# EAGLE board NixieTherm v1.03 (EAGLE 9.6.0)
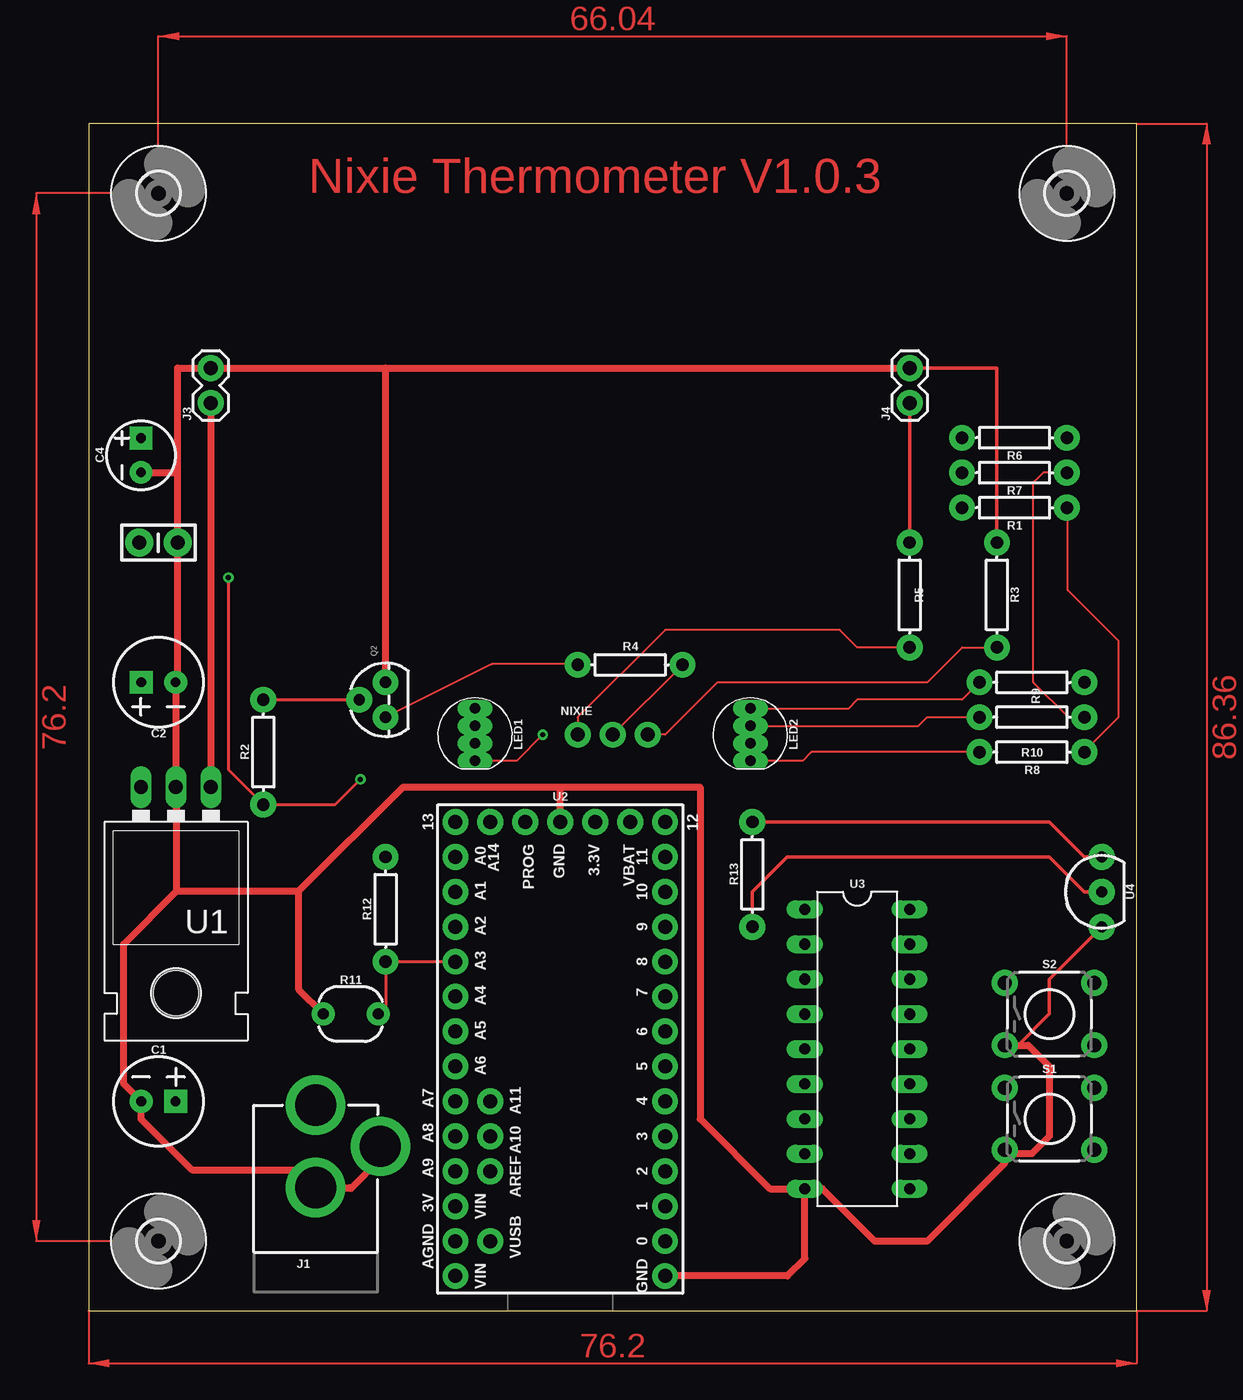
[diagram p0: board, top side]
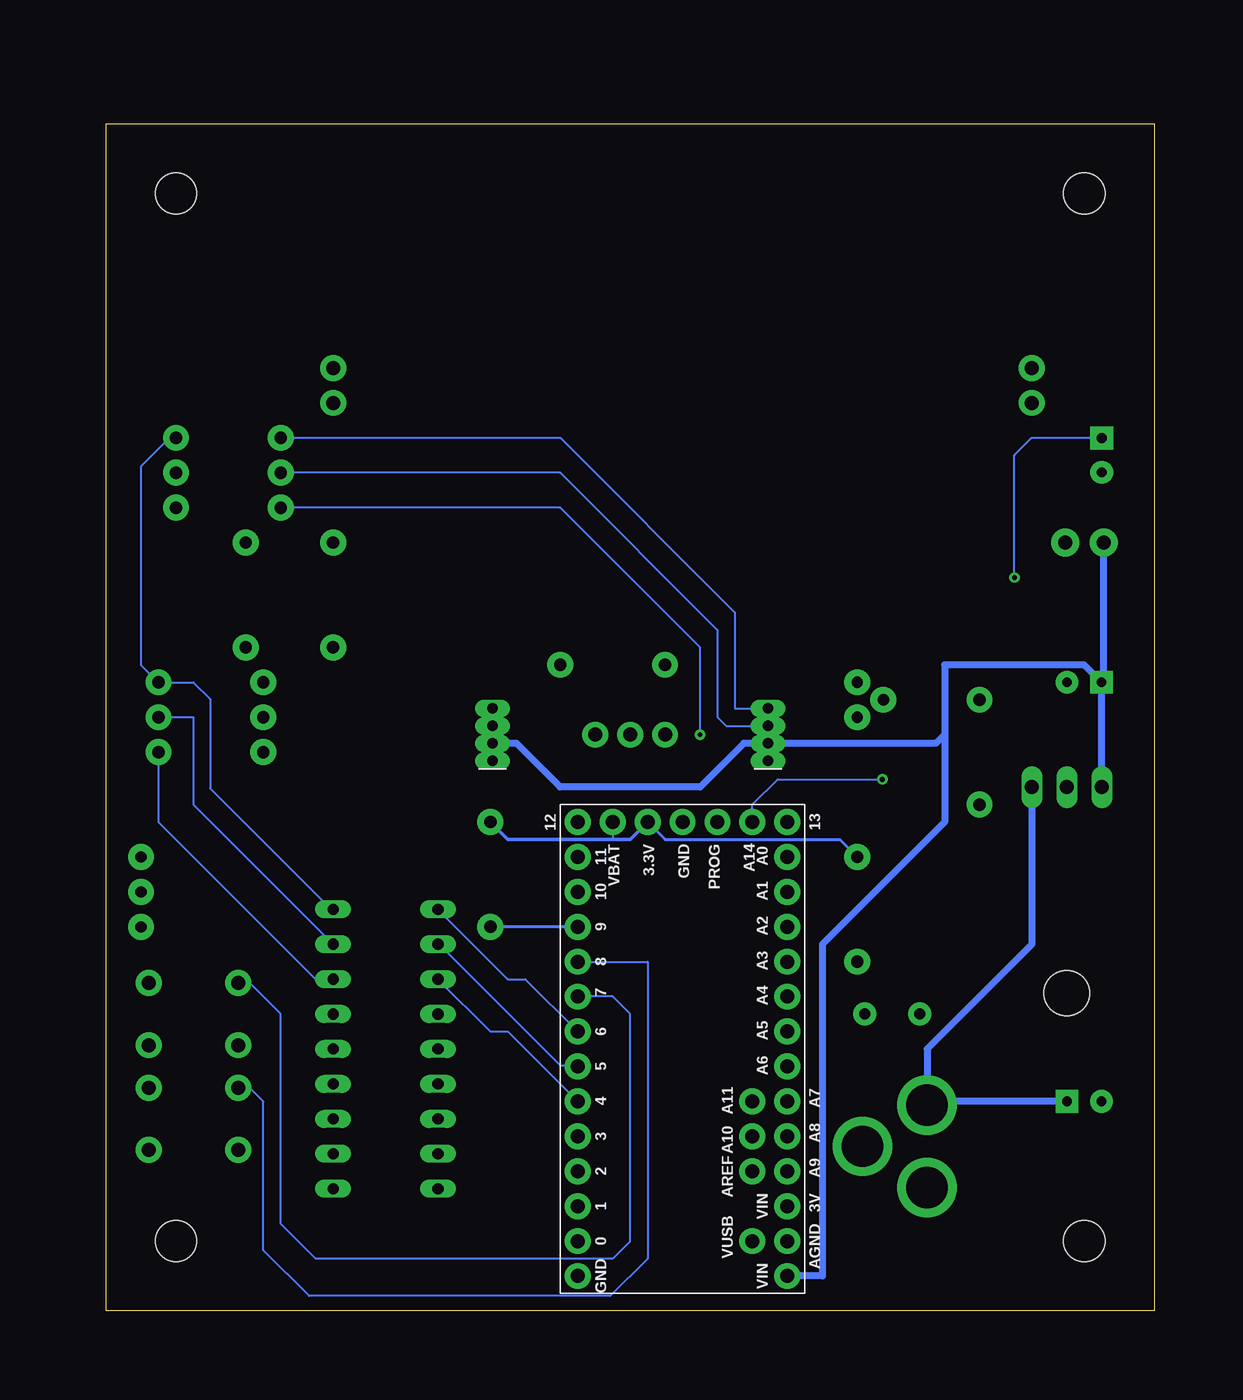
[diagram p1: board, bottom side, seen from below]

Size 76.2 x 86.36 mm. Coordinates in mm from the lower left corner, seen from the top.
Outline: 0,0 76.2,0 76.2,86.36 0,86.36 0,0
Copper layers (1*16): Top 0.035mm / dielectric 1.5mm / Bottom 0.035mm
Design rules "default": minimum track width 6mil, minimum drill 0.35mm, track to track 6mil, track to pad 6mil, pad to pad 6mil, via to via 6mil, smd to smd 6mil, copper to edge 40mil, drill to drill 6mil, minimum pad ring 10mil, minimum via ring 8mil, stop-mask expansion 4mil, vias tented up to drill 0mil, thermal gap 10mil

## Footprints (pad centres in the part's own frame; a part is rotated, then mirrored left to right if it is on the bottom)
CPOL-RADIAL-2.5MM-6.5MM = drill 0.7 pad 1.651 square: 1 1.25,0 | drill 0.7 pad 1.651: 2 -1.25,0
CAP-PTH-SMALL-KIT = drill 1.016 pad 2.032: 1 -1.397,0; 2 1.397,0
CPOL-RADIAL-2.5MM-5MM = drill 0.7 pad 1.651 square: 1 1.25,0 | drill 0.7 pad 1.651: 2 -1.25,0
3,0 = hole 3: 0,0
POWER_JACK_PTH = drill 2.997 pad 4.318: GND 0,7.7; GNDBREAK 4.7,10.7; PWR 0,13.7
1X02 = drill 1.016 pad 1.88: 1 0,0; 2 2.54,0
LED-RGB-THRU = drill 0.762 pad 0.889 long: 1 1.905,0; 2 0.635,0; 3 -0.635,0; 4 -1.905,0
1X03_NO_SILK = drill 1.016 pad 1.88: 1 0,0; 2 2.54,0; 3 5.08,0
TO-92 = drill 0.813 pad 1.88: 1 -1.27,0; 2 0,1.905; 3 1.27,0
AXIAL-0.3 = drill 0.9 pad 1.88: P$1 -3.81,0; P$2 3.81,0
PHOTOCELL = drill 0.8 pad 1.676: 1 -2,0; 2 2,0
TACTILE_SWITCH_PTH_6.0MM = drill 1.016 pad 1.88: 1 -3.251,2.261; 2 3.251,2.261; 3 -3.251,-2.261; 4 3.251,-2.261
TO-220-ALT = drill 1.016 long: GND 0,-3.81; IN -2.54,-3.81; OUT 2.54,-3.81 | hole 3.302: 0,11.176
TEENSY-3.1 = drill 1.016 pad 1.88: 0 7.62,-13.97; 1 7.62,-11.43; 2 7.62,-8.89; 3 7.62,-6.35; 3.3V 2.54,16.51; 3V -7.62,-11.43; 4 7.62,-3.81; 5 7.62,-1.27; 6 7.62,1.27; 7 7.62,3.81; 8 7.62,6.35; 9 7.62,8.89; 10 7.62,11.43; 11 7.62,13.97; 12 7.62,16.51; 13 -7.62,16.51; 14 -7.62,13.97; 15 -7.62,11.43; 16 -7.62,8.89; 17 -7.62,6.35; 18 -7.62,3.81; 19 -7.62,1.27; 20 -7.62,-1.27; 21 -7.62,-3.81; 22 -7.62,-6.35; 23 -7.62,-8.89; A10 -5.08,-6.35; A11 -5.08,-3.81; A14/DAC -5.08,16.51; AGND -7.62,-13.97; AREF -5.08,-8.89; GND 0,16.51; GND1 7.62,-16.51; PROG -2.54,16.51; VBAT 5.08,16.51; VIN -7.62,-16.51; VUSB -5.08,-13.97
DIL18 = drill 0.813 long: 1 -10.16,-3.81; 2 -7.62,-3.81; 3 -5.08,-3.81; 4 -2.54,-3.81; 5 0,-3.81; 6 2.54,-3.81; 7 5.08,-3.81; 8 7.62,-3.81; 9 10.16,-3.81; 10 10.16,3.81; 11 7.62,3.81; 12 5.08,3.81; 13 2.54,3.81; 14 0,3.81; 15 -2.54,3.81; 16 -5.08,3.81; 17 -7.62,3.81; 18 -10.16,3.81
TO-92-AMMO = drill 0.813 pad 1.88: 1 -2.54,0; 2 0,0; 3 2.54,0

## Placement (x,y rotation side)
C1  100uF  [CPOL-RADIAL-2.5MM-6.5MM]  5.08,15.24 0 top
C2  100uF  [CPOL-RADIAL-2.5MM-6.5MM]  5.08,45.72 180 top
C3  0.1uF  [CAP-PTH-SMALL-KIT]  5.08,55.88 0 top
C4  10uF  [CPOL-RADIAL-2.5MM-5MM]  3.81,62.23 90 top
H1  MOUNT-HOLE3.0  [3,0]  71.12,81.28 0 top
H2  MOUNT-HOLE3.0  [3,0]  5.08,5.08 0 top
H3  MOUNT-HOLE3.0  [3,0]  71.12,5.08 0 top
H4  MOUNT-HOLE3.0  [3,0]  5.08,81.28 0 top
J1  +12VDC  [POWER_JACK_PTH]  16.51,1.27 0 top
J3  J3  [1X02]  8.89,66.04 90 top
J4  J4  [1X02]  59.69,66.04 90 top
LED1  CLEAR  [LED-RGB-THRU]  28.09,41.91 270 top
LED2  CLEAR  [LED-RGB-THRU]  48.11,41.91 270 top
NIXIE  IN-12  [1X03_NO_SILK]  35.56,41.91 0 top
Q2  2N4960  [TO-92]  21.59,44.45 90 top
R1  330  [AXIAL-0.3]  67.31,58.42 180 top
R2  4K7  [AXIAL-0.3]  12.7,40.64 90 top
R3  100k  [AXIAL-0.3]  66.04,52.07 270 top
R4  420  [AXIAL-0.3]  39.37,46.99 0 top
R5  220K  [AXIAL-0.3]  59.69,52.07 270 top
R6  330  [AXIAL-0.3]  67.31,63.5 180 top
R7  330  [AXIAL-0.3]  67.31,60.96 180 top
R8  330  [AXIAL-0.3]  68.58,40.64 180 top
R9  330  [AXIAL-0.3]  68.58,45.72 180 top
R10  330  [AXIAL-0.3]  68.58,43.18 180 top
R11  PHOTOCELLPTH  [PHOTOCELL]  19.05,21.59 0 top
R12  10k  [AXIAL-0.3]  21.59,29.21 90 top
R13  1k  [AXIAL-0.3]  48.26,31.75 90 top
S1  SPST  [TACTILE_SWITCH_PTH_6.0MM]  69.85,13.97 0 top
S2  SPST  [TACTILE_SWITCH_PTH_6.0MM]  69.85,21.59 0 top
U1  LM7805  [TO-220-ALT]  6.35,34.29 180 top
U2  TEENSY-3.1SILK  [TEENSY-3.1]  34.29,19.05 0 top
U3  ULN2003  [DIL18]  55.88,19.05 270 top
U4  DS18B20  [TO-92-AMMO]  73.66,30.48 90 top

## Library data of the parts
C1 C2 = SparkFun-Capacitors; PROD_ID: CAP-08439
C3 = SparkFun-Capacitors; PROD_ID: CAP-08370
C4 = SparkFun-Capacitors; PROD_ID: CAP-08440
H1-H4 = holes
J1 = SparkFun-Connectors; PROD_ID: CONN-08197
J3 J4 NIXIE = SparkFun-Connectors
LED1 LED2 = SparkFun-LED; PROD_ID: DIO-10631
Q2 = User-Submitted
R1 R6-R10 R13 = SparkFun-Resistors; PROD_ID: RES-12182
R2-R5 = SparkFun-Resistors; PROD_ID: RES-12184
R11 = SparkFun-Sensors; PROD_ID: COMP-09129; SF_ID: SEN-09088
R12 = SparkFun-Resistors; PROD_ID: RES-12183
S1 S2 = SparkFun-Switches; PROD_ID: SWCH-08441; SF_SKU: COM-00097
U1 = SparkFun-IC-Power; PROD_ID: VREG-08450; SF_ID: COM-00107
U2 = SparkFun-Boards; SF_ID: DEV-12646
U3 = SparkFun-IC-Special-Function
U4 = SparkFun-Sensors; STORE_ID: SEN-00245

## Nets
3.3V: R12.P$2 R13.P$2 U2.3.3V U2.VBAT U4.3
3V: U2.3V
5V: C2.1 C3.1 LED1.2 LED2.2 U1.OUT U2.VIN
12V: C1.1 J1.PWR J3.1 U1.IN
AGND: U2.AGND
GND: C1.2 C2.2 C3.2 C4.2 J1.GND J1.GNDBREAK J3.2 J4.2 Q2.3 R3.P$1 R11.1 S1.3 S2.3 U1.GND U2.GND U2.GND1 U3.9 U4.1
N$1: R6.P$1 R9.P$1 U3.18
N$2: R1.P$1 R8.P$1 U3.16
N$3: R7.P$1 R10.P$1 U3.17
N$4: NIXIE.1 R5.P$2
N$5: NIXIE.3 R3.P$2
N$6: NIXIE.2 R4.P$2
N$7: Q2.2 R2.P$2
N$8: Q2.1 R4.P$1
N$9: C4.1 R2.P$1 U2.A14/DAC
N$10: U2.4 U3.3
N$11: U2.5 U3.2
N$12: U2.6 U3.1
N$13: S2.1 U2.7
N$14: LED1.1 R1.P$2
N$15: S1.1 U2.8
N$16: LED1.4 R6.P$2
N$17: LED1.3 R7.P$2
N$18: LED2.1 R8.P$2
N$19: LED2.4 R9.P$2
N$20: LED2.3 R10.P$2
N$21: J4.1 R5.P$1
N$22: R11.2 R12.P$1 U2.17
N$23: R13.P$1 U2.9 U4.2
VUSB: U2.VUSB

## Tracks (layer width: path | path; a pad name or v marks a point on that pad's centre or on a via)
3.3V
  Top 0.254: U4.3 72.39,33.02 69.85,35.56 R13.P$2
  Bottom 0.152: U2.VBAT 39.37,34.29
  Bottom 0.203: U2.3.3V 35.56,34.29 22.86,34.29 R12.P$2
  Bottom 0.254: R13.P$2 46.99,34.29 39.37,34.29 38.1,34.29 U2.3.3V
5V
  Top 0.152: 3.96,45.82 C2.1 3.81,45.67
  Bottom 0.152: 26.26,2.54 U2.VIN 26.67,3.35 | 3.81,38.05 U1.OUT | 32.92,37.95 33.02,38.1
  Bottom 0.508: U1.OUT 3.81,45.7 C2.1 | C2.1 3.68,45.87 C3.1 | C2.1 5.1,46.99 15.24,46.99 15.24,41.91 | 15.24,41.91 15.88,41.27 LED1.2 29.84,41.27 33.02,38.1 43.18,38.1 46.35,41.27 LED2.2 | 15.24,41.91 15.24,35.56 24.13,26.67 24.13,2.54 U2.VIN
12V
  Top 0.508: J3.1 U1.IN
  Bottom 0.152: 16.41,14.94 J1.PWR 16.41,15.09
  Bottom 0.508: U1.IN 8.89,26.67 16.51,19.05 16.51,15.24 | 16.51,15.24 J1.PWR | C1.1 16.51,15.24
GND
  Top 0.152: C2.2 6.4,45.67 6.4,38.2 U1.GND 6.4,38.05
  Top 0.254: U4.1 69.85,24.13 69.85,21.59 67.59,19.33 67.31,19.33 | R3.P$1 66.04,68.58 J4.2
  Top 0.508: 6.4,30.53 6.4,38.2 | 6.4,30.53 2.54,26.67 2.54,16.53 C1.2 3.81,15.22 3.81,13.97 7.54,10.24 15.24,10.24 J1.GND 18.97,8.97 19.05,8.89 21.21,11.05 J1.GNDBREAK | U1.GND 6.35,45.72 C2.2 6.48,45.87 C3.2 6.48,60.96 | 15.29,30.53 22.86,38.1 34.29,38.1 | 6.4,30.53 15.29,30.53 | 34.29,38.1 44.45,38.1 44.45,13.97 49.53,8.89 U3.9 | S1.3 66.6,11.43 | 66.6,11.43 66.6,10.72 60.96,5.08 57.15,5.08 53.34,8.89 U3.9 | S2.3 67.31,19.33 68.3,19.33 69.85,17.78 69.85,12.7 68.58,11.43 66.6,11.43 | U3.9 52.07,3.81 50.8,2.54 U2.GND1 | Q2.3 21.59,68.58 | 21.59,68.58 J3.2 6.48,68.58 6.48,60.96 | U2.GND 34.29,38.1 | 21.59,68.58 J4.2 | R11.1 15.29,23.35 15.29,30.53 | C4.2 3.83,60.96 6.48,60.96
  Bottom 0.152: 6.4,45.82 C2.2
N$1
  Bottom 0.152: U3.18 59.84,29.21 68.63,38 68.63,44.5 69.85,45.72 R9.P$1 73.66,46.99 73.66,61.42 71.58,63.5 R6.P$1
N$2
  Top 0.152: R1.P$1 71.17,58.37 71.17,52.43 74.88,48.72 74.88,43.18 72.39,40.69 R8.P$1
  Bottom 0.152: R8.P$1 72.39,35.56 60.96,24.13 U3.16
N$3
  Top 0.152: 72.39,43.13 R10.P$1 71.22,43.18 68.68,45.72 68.68,60.25 69.39,60.96 R7.P$1
  Bottom 0.152: R10.P$1 69.85,43.18 69.85,36.83 U3.17
N$4
  Top 0.152: NIXIE.1 35.56,43.18 41.91,49.53 54.61,49.53 55.88,48.26 R5.P$2
N$5
  Top 0.152: NIXIE.3 41.91,41.91 45.72,45.72 60.96,45.72 63.5,48.26 R3.P$2
N$6
  Top 0.152: R4.P$2 NIXIE.2
N$7
  Top 0.203: R2.P$2 Q2.2
N$8
  Top 0.152: Q2.1 29.31,47.04 35.56,47.04 R4.P$1
N$9  (via drill 0.35)
  Top 0.203: v19.76,38.66 17.93,36.83 R2.P$1 10.16,39.37 v10.16,53.34
  Bottom 0.152: U2.A14/DAC 29.21,36.83 27.38,38.66 v19.76,38.66 | v10.16,53.34 10.16,62.23 8.89,63.5 3.83,63.5 C4.1
N$10
  Bottom 0.152: U3.3 48.26,20.32 46.99,20.32 U2.4
N$11
  Bottom 0.152: U3.2 51.97,26.67 43.13,17.83 41.91,17.83 U2.5
N$12
  Bottom 0.152: 51.97,29.11 U3.1 46.99,24.13 45.72,24.13 U2.6
N$13
  Bottom 0.152: U2.7 39.37,22.86 38.1,21.59 38.1,5.08 39.37,3.81 60.96,3.81 63.5,6.35 63.5,21.59 65.76,23.85 S2.1
N$14  (via drill 0.35)
  Top 0.152: 63.4,58.37 R1.P$2 | v33.02,41.91 31.11,40.01 LED1.1
  Bottom 0.152: v33.02,41.91 33.02,48.26 43.18,58.42 R1.P$2
N$15
  Bottom 0.152: U2.8 36.83,25.4 36.83,3.81 39.55,1.09 61.44,1.09 64.77,4.42 64.77,15.24 65.76,16.23 S1.1
N$16
  Bottom 0.152: 63.4,63.4 R6.P$2 43.18,63.5 30.48,50.8 30.48,43.81 LED1.4
N$17
  Bottom 0.152: R7.P$2 43.18,60.96 31.75,49.53 31.75,43.18 31.11,42.55 LED1.3
N$18
  Top 0.152: 64.67,40.54 R8.P$2 52.55,40.64 51.92,40.01 LED2.1
N$19
  Top 0.152: LED2.4 48.14,43.79 55.22,43.79 55.88,44.45 63.5,44.45 R9.P$2
N$20
  Top 0.152: LED2.3 60.33,42.55 60.96,43.18 R10.P$2
N$21
  Top 0.254: J4.1 R5.P$1
N$22
  Top 0.203: U2.17 R12.P$1 21.59,22.13 R11.2
N$23
  Top 0.254: R13.P$1 48.26,30.48 50.8,33.02 69.85,33.02 72.39,30.48 U4.2
  Bottom 0.203: U2.9 R13.P$1
(copper drawn outside any net)
  shapes: Top area x4

## Text on the board
Top: Nixie Thermometer V1.0.3